# Altium PCB MainPCB.PcbDoc
Units mm, origin at the board's own origin, x right, y up, seen from the top; angles counter-clockwise.
Board outline 98.17 x 99.82 mm, 4 copper layers (Top Layer, PWR, GND, Bottom Layer), stack 1.57 mm thick; 53 components, 48 nets, 225 pads, 28 vias.
Unrouted connection lines stored in the file: 41.
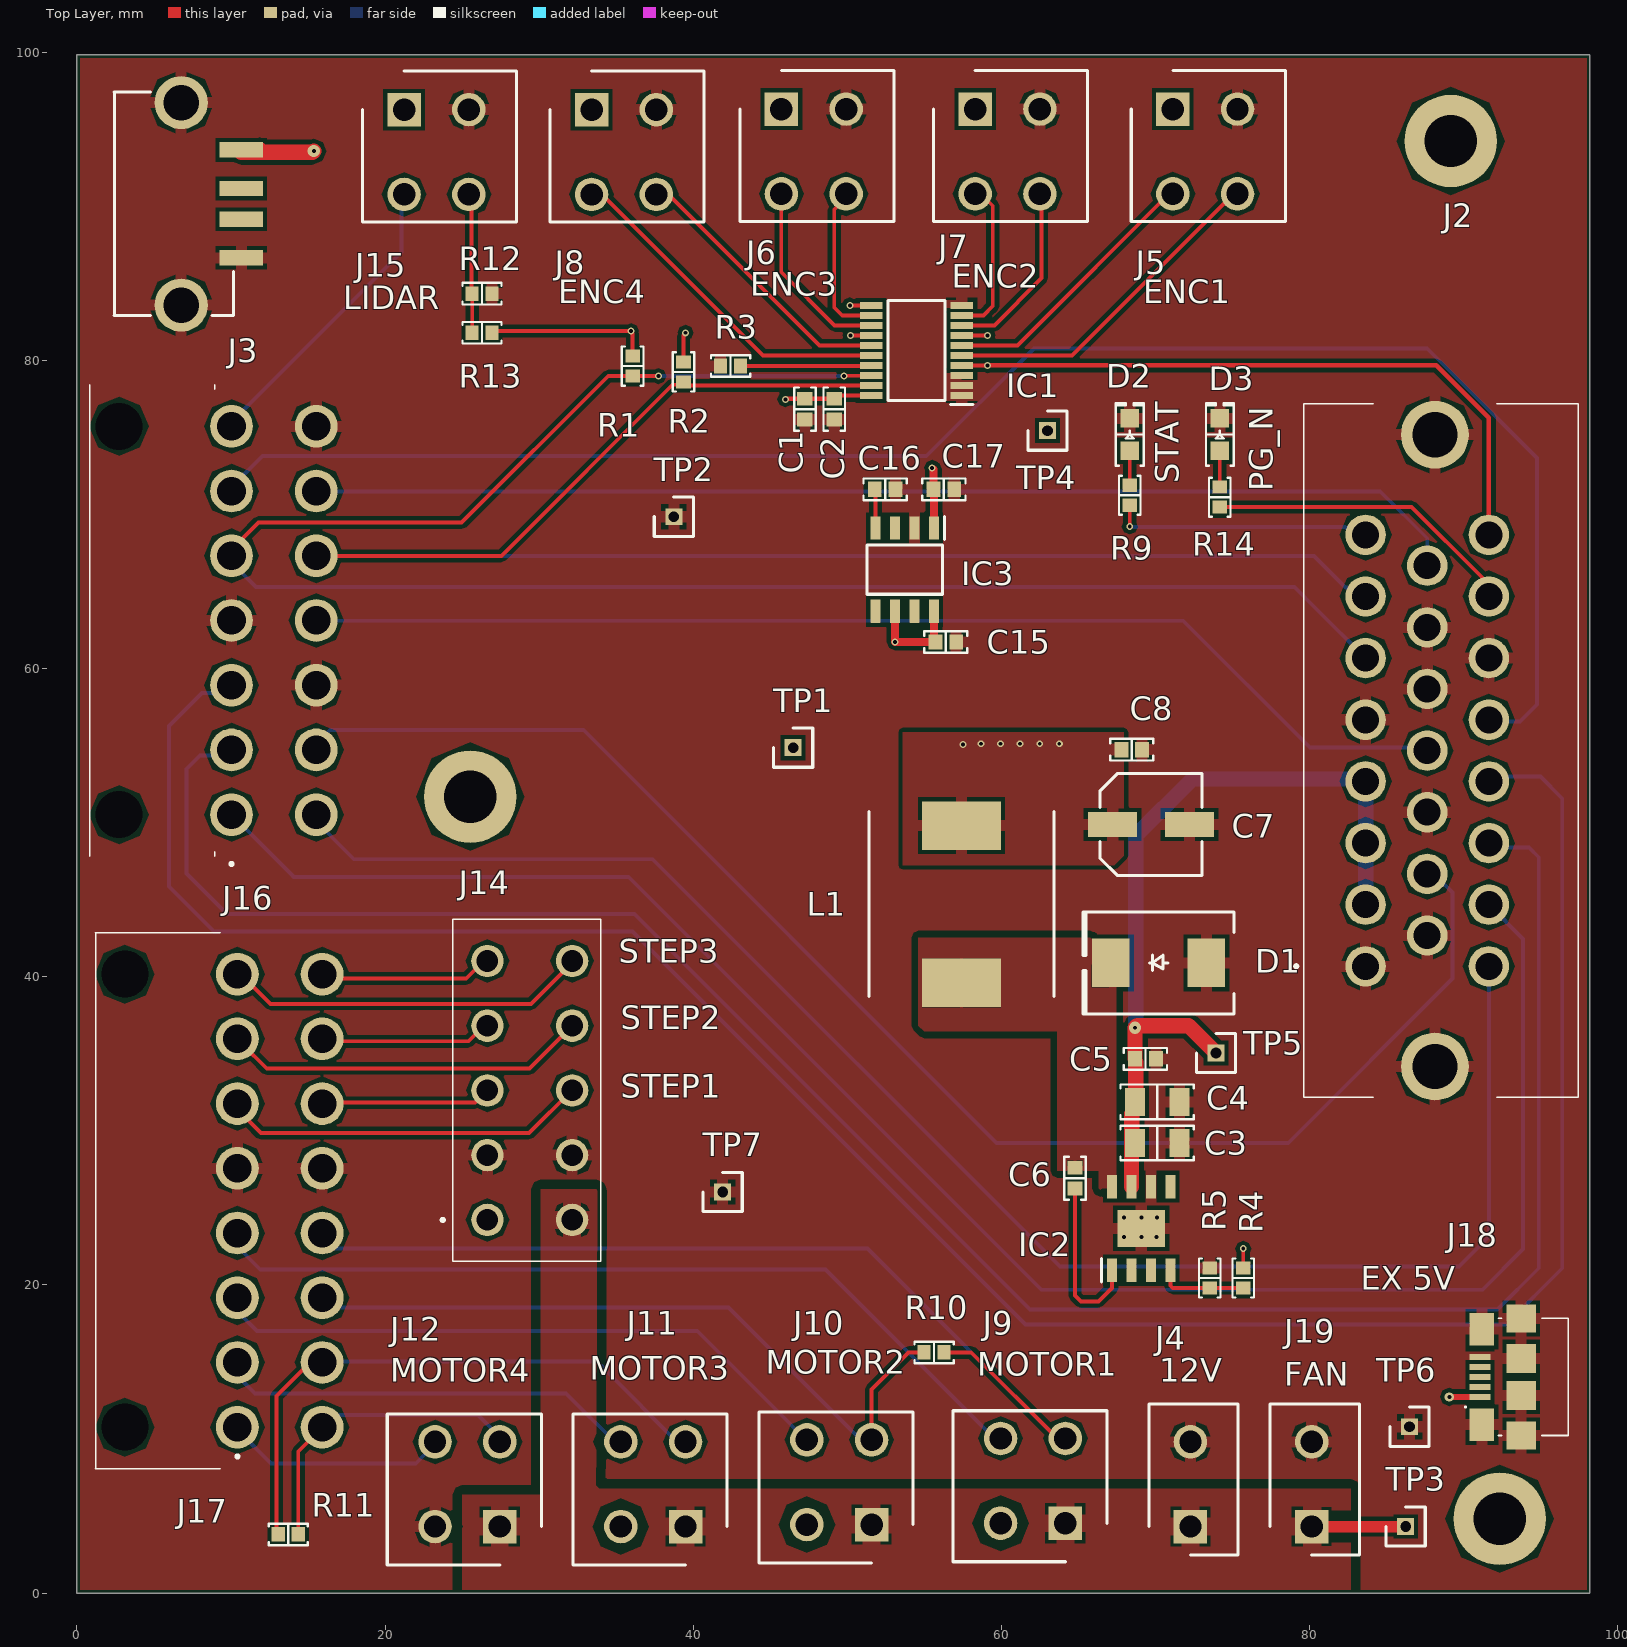
[diagram p0: Top Layer view]
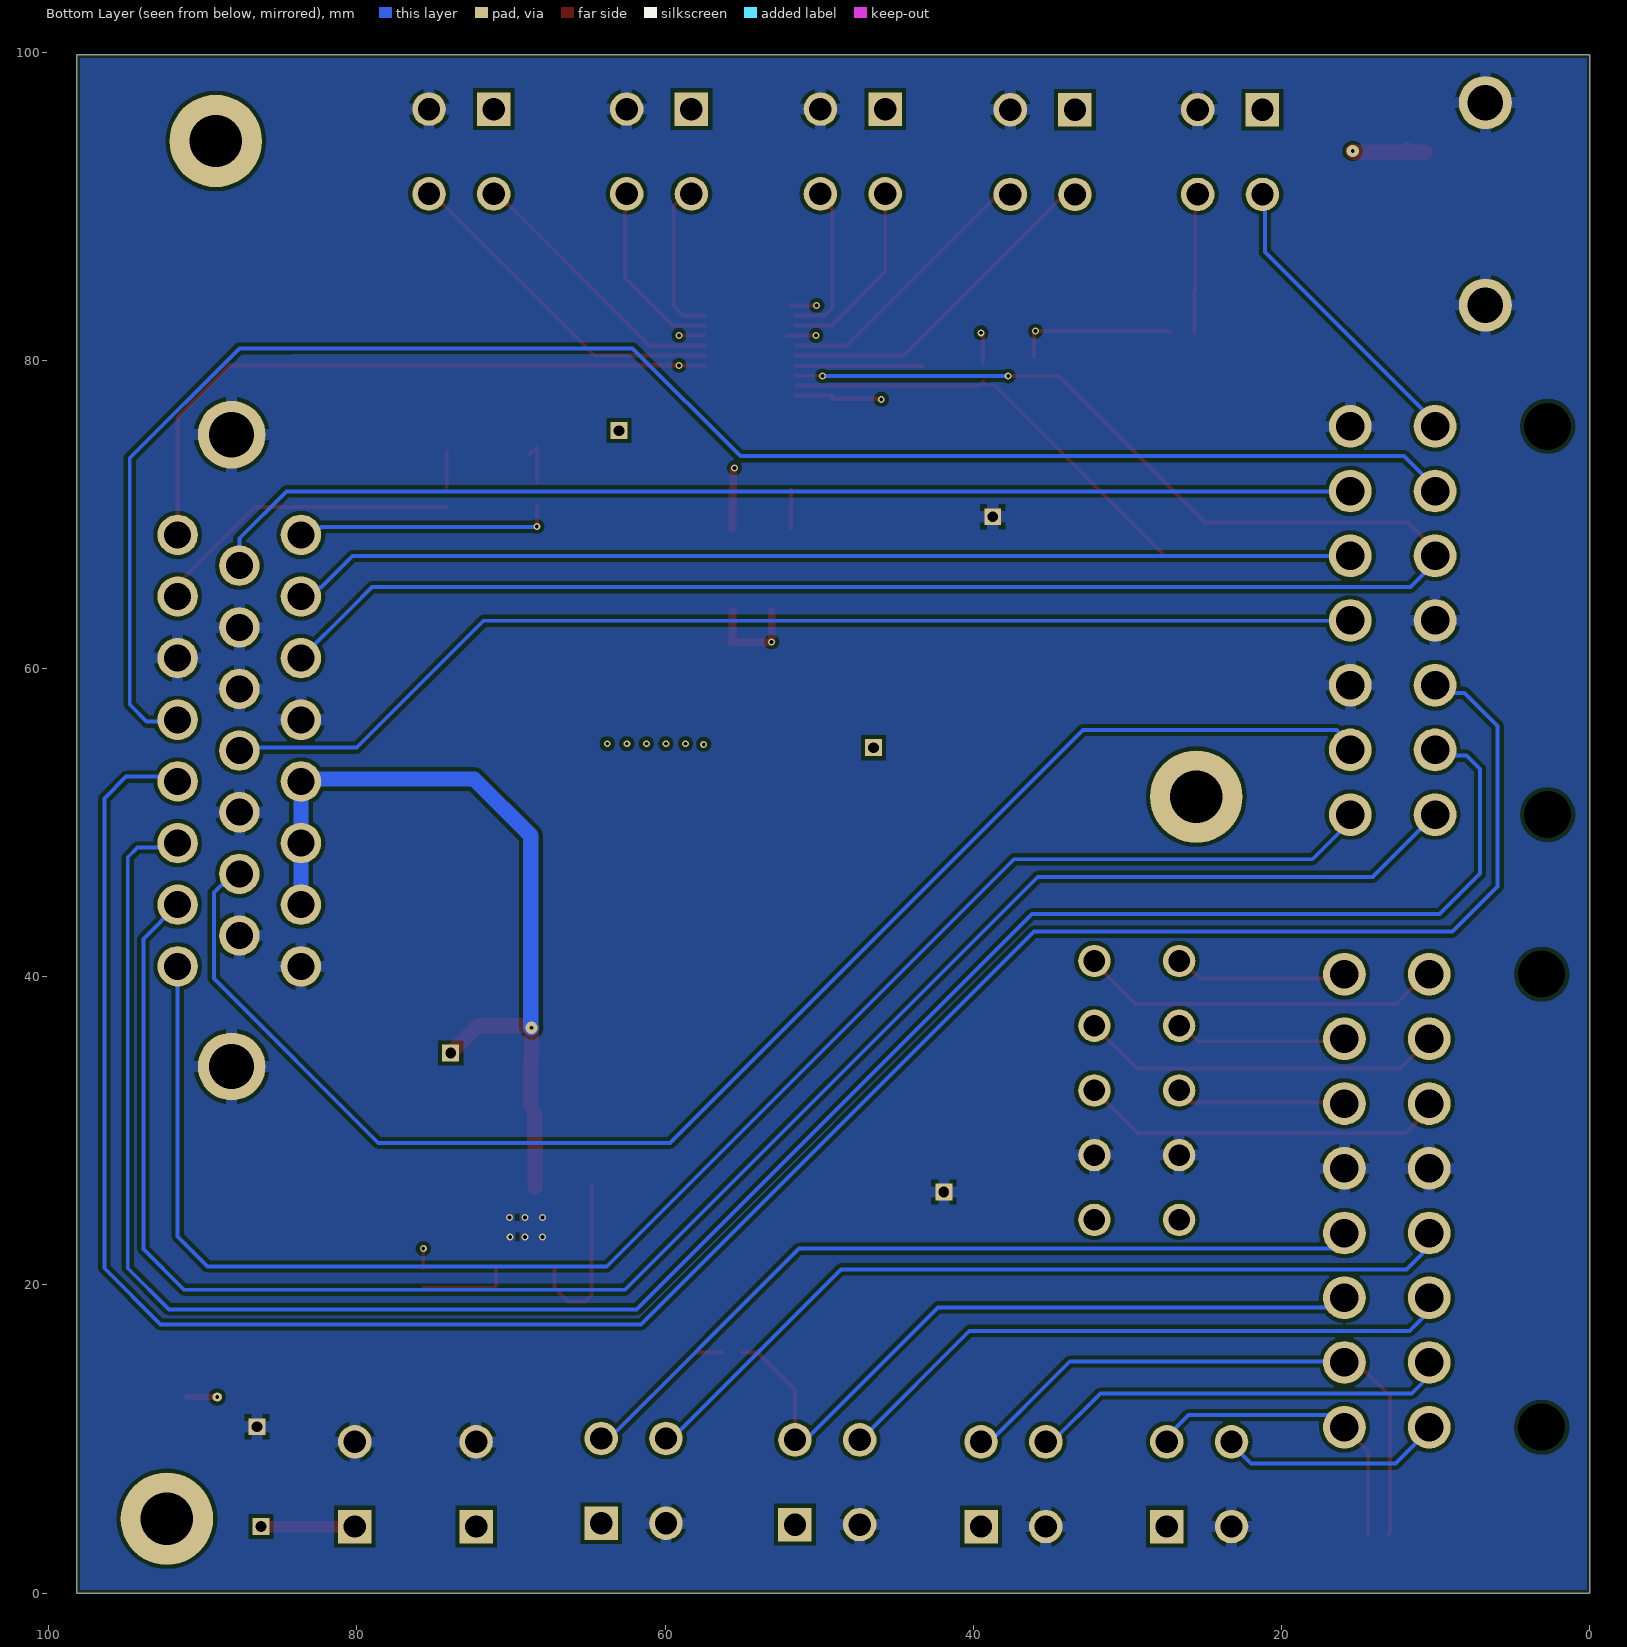
[diagram p1: Bottom Layer view, seen from below]
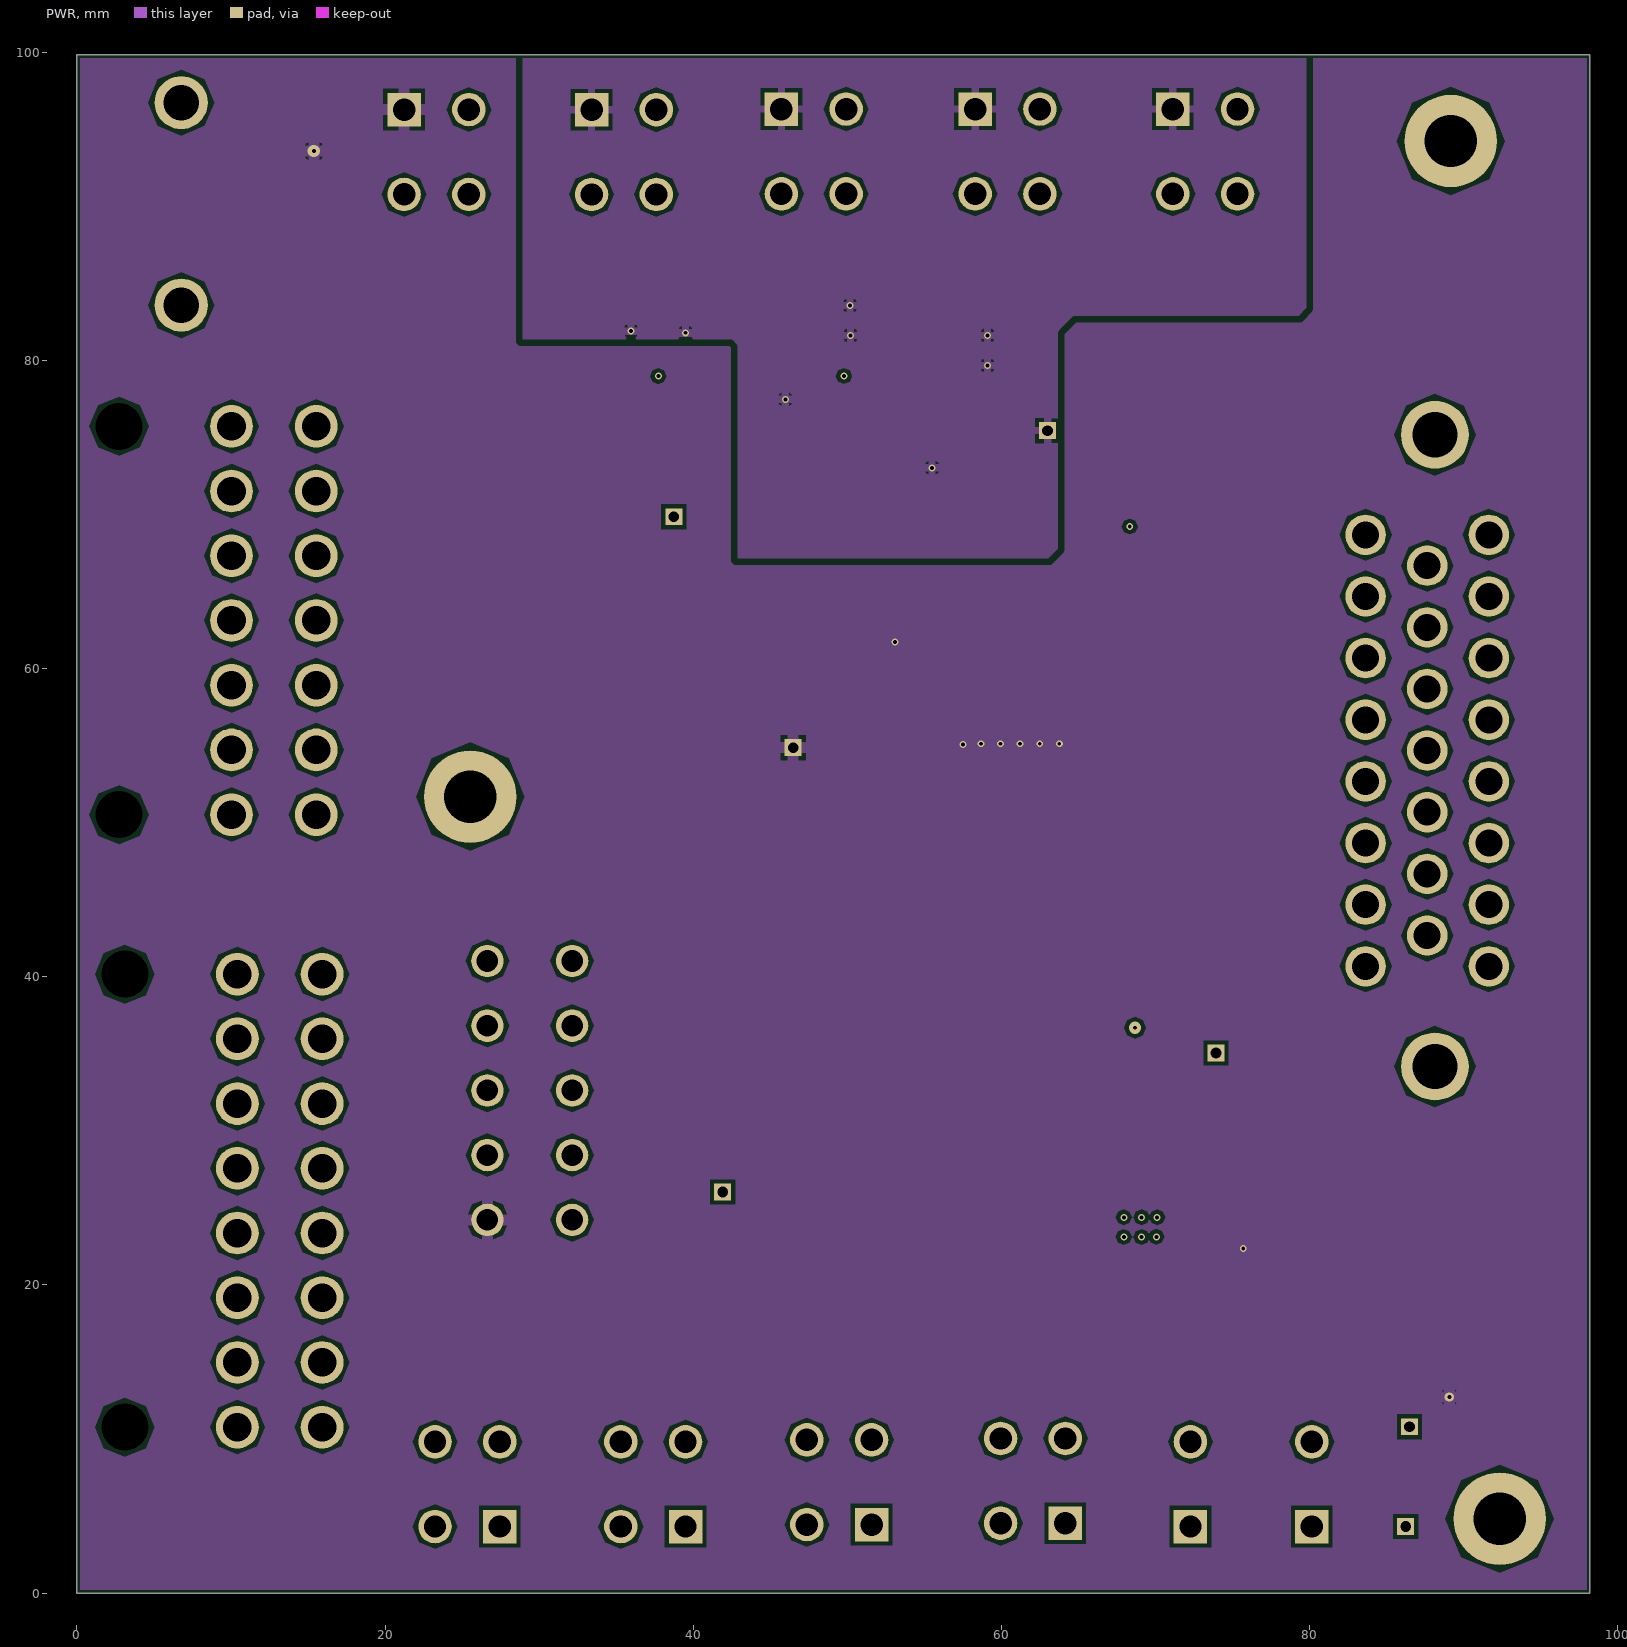
[diagram p2: PWR]
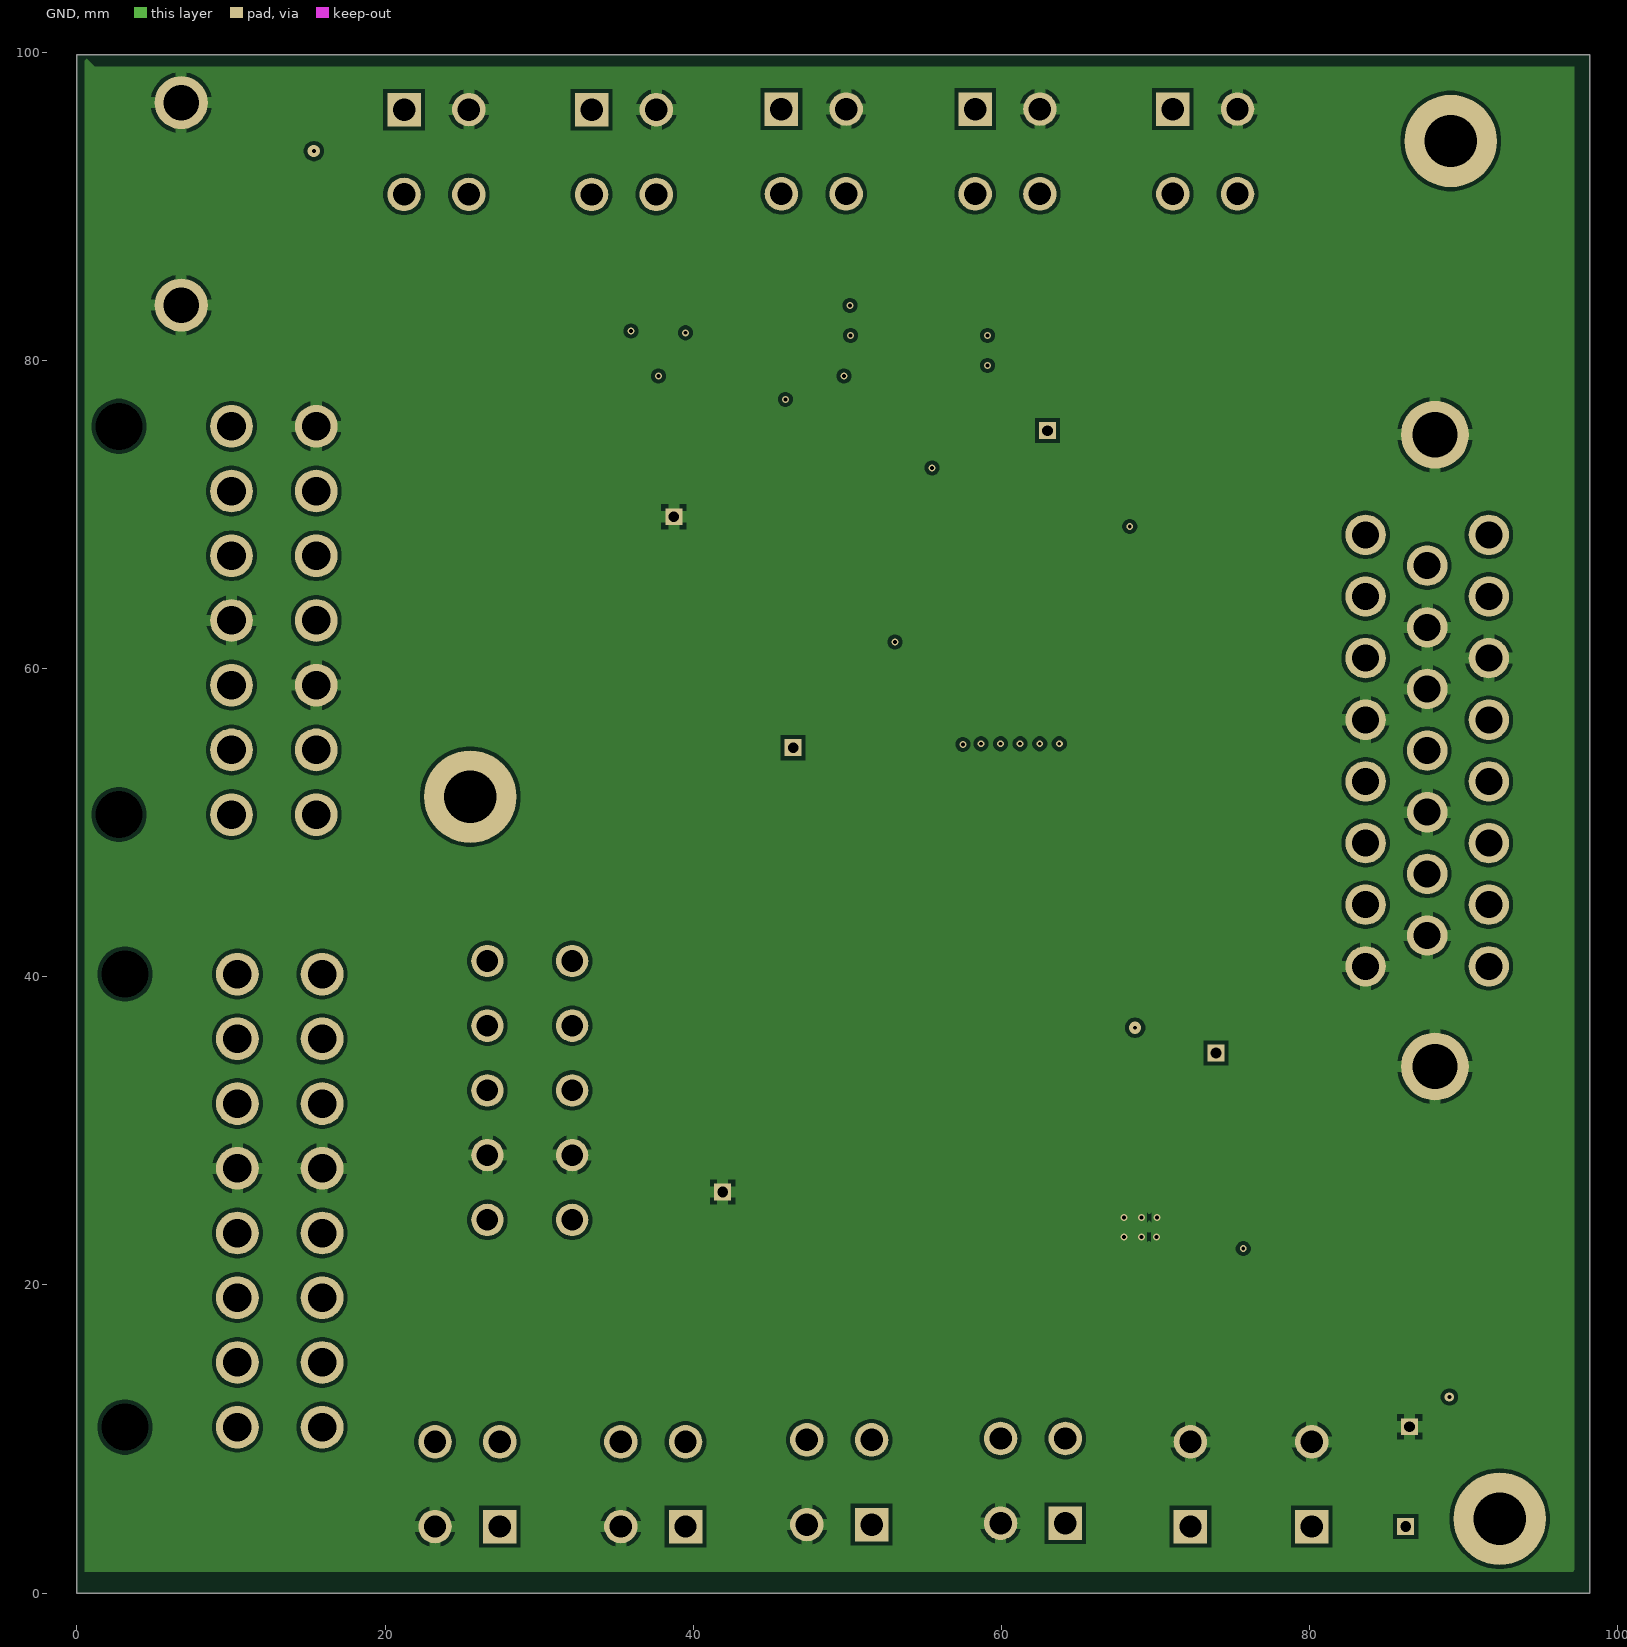
[diagram p3: GND]
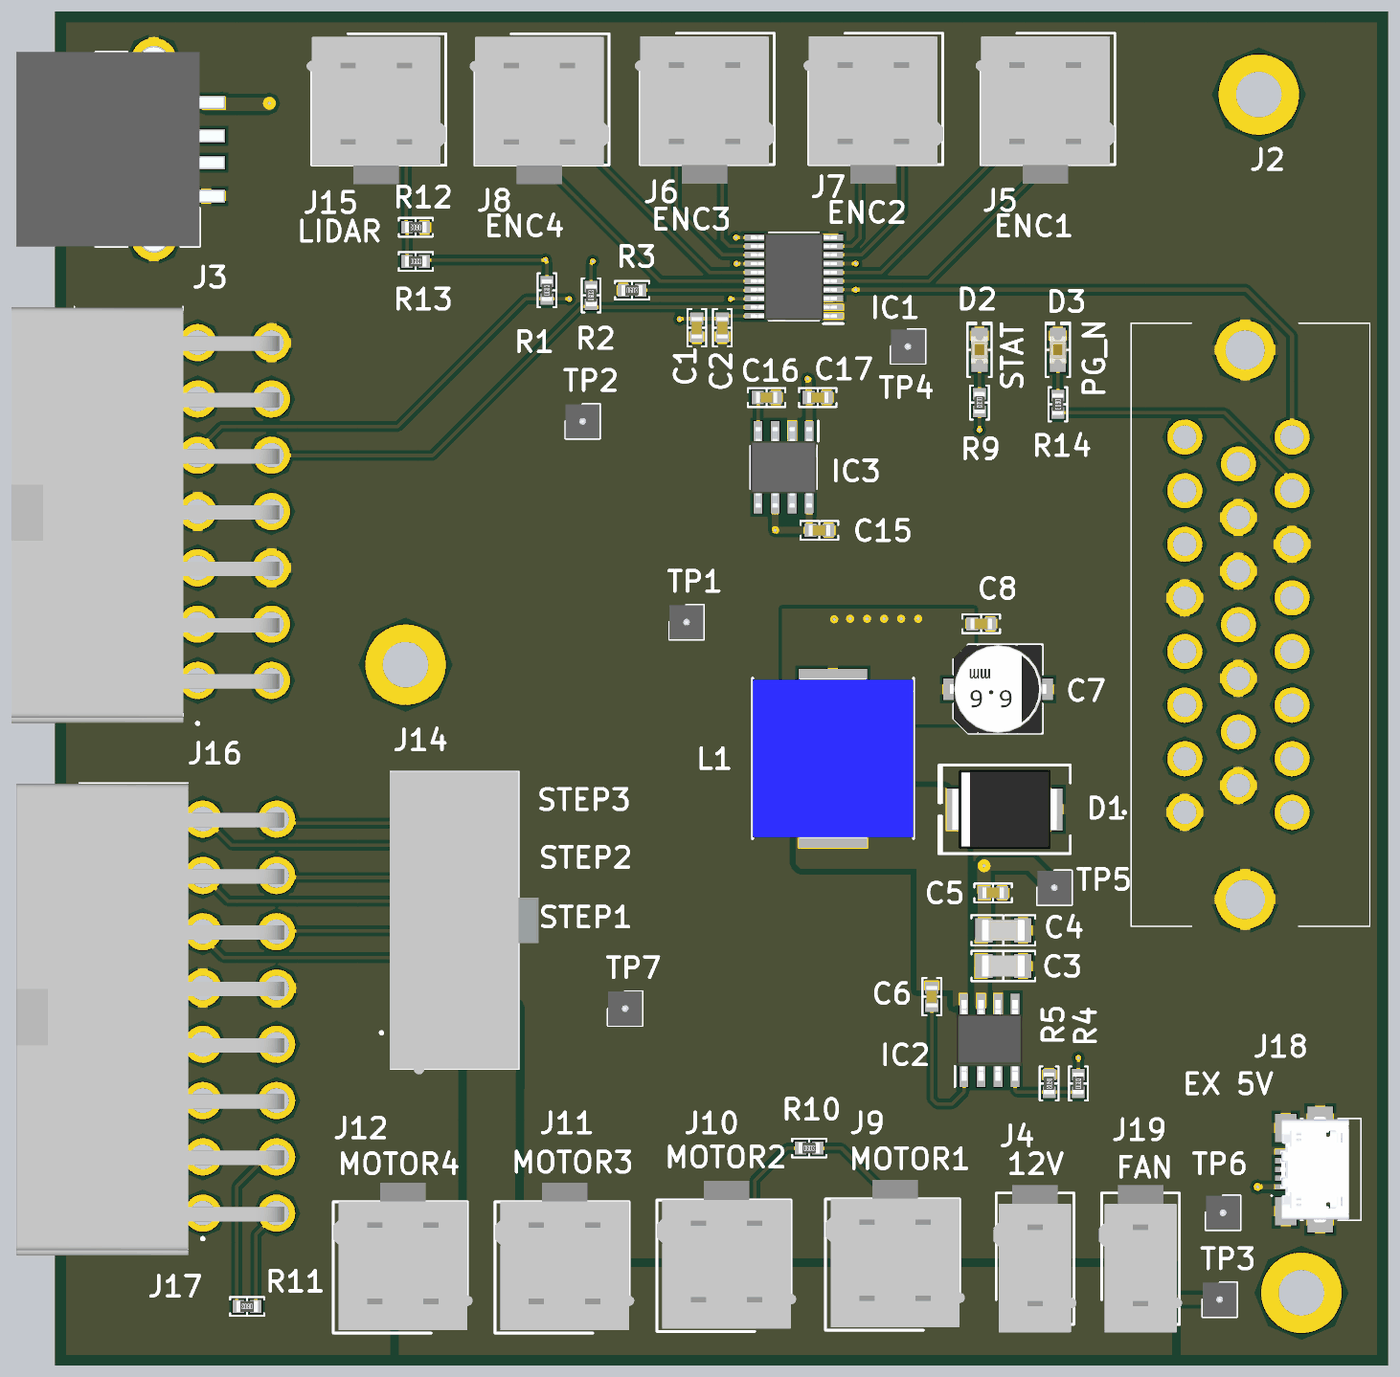
[diagram p4: 3D render of the assembled board from above, using the file's embedded part models]

## Layer stack, top to bottom
Top Solder: solder mask 0.0127, Solder Resist, Dk 3.8
Top Layer: signal copper 0.035
Dielectric 1: prepreg 0.2, 7628, Dk 4.6
PWR: signal copper 0.0175
Core: core 1.065, FR-4, Dk 4.5
GND: signal copper 0.0175
Dielectric 2: prepreg 0.2, 7628, Dk 4.6
Bottom Layer: signal copper 0.035
Bottom Solder: solder mask 0.0127, Solder Resist, Dk 3.8

## Board outline
0,0 98.171,0 98.171,99.822 0,99.822

## Design rules (kind name [scope] priority, off if disabled: settings)
BoardOutlineClearance [All] p1: gap=0.2 ignorepadtopadclearanceinfootprint=FALSE
Clearance Clearance_4 [InNamedPolygon('NETC6_1_L01_P044')] p1: gap=0.4 ignorepadtopadclearanceinfootprint=FALSE except(0: Arc-Hole Track-Hole SMDPad-Hole THPad-Hole Via-Hole Fill-Hole Poly-Hole Region-Hole Text-Hole; 0.254: Arc-Text Track-Text SMDPad-Text THPad-Text Via-Text Fill-Text Poly-Text Region-Text Text-Text)
Clearance Clearance_3 [InNamedPolygon('12V_L01_P041')] p2: gap=0.6 ignorepadtopadclearanceinfootprint=FALSE except(0: Arc-Hole Track-Hole SMDPad-Hole THPad-Hole Via-Hole Fill-Hole Poly-Hole Region-Hole Text-Hole; 0.5: Arc-Text Track-Text SMDPad-Text THPad-Text Via-Text Fill-Text Poly-Text Region-Text Text-Text)
Clearance [All] p3: gap=0.25 ignorepadtopadclearanceinfootprint=FALSE except(0.102: Hole-Hole; 0.12: Arc-Arc Arc-Track Track-Track; 0.15: Arc-SMDPad Arc-THPad Arc-Via Arc-Hole Track-SMDPad Track-THPad Track-Via Track-Hole SMDPad-SMDPad SMDPad-THPad THPad-THPad)
Clearance PolyClearance [InNet('12V')] p4: gap=5 ignorepadtopadclearanceinfootprint=FALSE
ComponentClearance [All] p1: gap=0.102 collisioncheckmode=3 verticalgap=0.102 showdistances=TRUE
DiffPairsRouting [All] p1: maxlimit=0.102 minlimit=0.102 mostfreqgap=0.102 toplayer_minwidth=0.102 toplayer_maxwidth=1816.048 toplayer_prefwidth=0.102 midlayer1_minwidth=0.102 midlayer1_maxwidth=1816.048 midlayer1_prefwidth=0.102 midlayer2_minwidth=0.102 midlayer2_maxwidth=1816.048 midlayer2_prefwidth=0.102 bottomlayer_minwidth=0.102 bottomlayer_maxwidth=1816.048 bottomlayer_prefwidth=0.102 maxuncoupledlength=12.7
Height [All] p1: minheight=0 maxheight=1816.048 prefheight=12.7
HoleSize [All] p1: absolutevalues=TRUE maxlimit=6.3 minlimit=0.2 maxpercent=80.000 minpercent=20.000
HoleToHoleClearance [All] p1: gap=0.25 allowstackedmicrovias=FALSE
MinimumAnnularRing [All] p1: minimumring=0.076
MinimumSolderMaskSliver [All] p1: minsoldermaskwidth=0
PlaneClearance [All] p1: clearance=0.2
PlaneConnect PlaneConnectPowerPads [InPadClass('PowerPads')] p1: planeconnectstyle=Relief reliefexpansion=0.508 reliefentries=4 reliefconductorwidth=1 reliefairgap=0.15
PlaneConnect [All] p2: planeconnectstyle=Relief reliefexpansion=0.3 reliefentries=4 reliefconductorwidth=1 reliefairgap=0.2
PolygonConnect PolygonConnect_2 [InNet('3V3')] p1: connectstyle=Relief reliefconductorwidth=0.5 reliefentries=4 polygonreliefangle="90 Angle" airgapwidth=0.254
PolygonConnect PolygonConnect_3 [InNet('5V')] p2: connectstyle=Relief reliefconductorwidth=0.75 reliefentries=4 polygonreliefangle="90 Angle" airgapwidth=0.254
PolygonConnect PolygonConnect_1 [InNet('GND')] p3: connectstyle=Relief reliefconductorwidth=0.75 reliefentries=4 polygonreliefangle="90 Angle" airgapwidth=0.254
PolygonConnect PolygonConnectPowerPads [All vs (InPadClass('PowerPads'))] p4: connectstyle=Relief reliefconductorwidth=0.5 reliefentries=4 polygonreliefangle="90 Angle" airgapwidth=0.254
PolygonConnect [InNet('12V')] p5: connectstyle=Relief reliefconductorwidth=1.2 reliefentries=4 polygonreliefangle="90 Angle" airgapwidth=0.2
RoutingVias [All] p1: holewidth=0.2 width=0.45 viastyle="Through Hole" minholewidth=0.2 minwidth=0.45 maxholewidth=6.3 maxwidth=6.55
SilkToSilkClearance [All] p1: silktosilkclearance=0
SilkToSolderMaskClearance [IsPad] p1: minsilkscreentomaskgap=0.102 clearancetoexposedcopper=TRUE
SolderMaskExpansion [All] p1: expansion=0.075 istentingtop=FALSE
Width [All] p1: maxlimit=1816.048 minlimit=0.102 preferedwidth=0.102
20 further rules are at their usual default settings.

## Classes and differential pairs
component class Designator: C1 C2 IC1 J5 J6 J7 J8 J9 J10 J11 J12 J14 J15 R1 R2 R3 R12 R13

## Components (designator, comment, footprint, x,y, rotation, side; value= is the part's Value field where it differs from the comment)
C1 "1µF" "CAP 0603_1608" 47.244,76.835 r90 top
C2 "10000pF" "CAP 0603_1608" 49.149,76.835 r90 top
C3 "4.7µF" "CAP 1206_3216 - 1.0MM" 70.104,29.21 r180 top
C4 "4.7µF" "CAP 1206_3216 - 1.0MM" 70.104,31.877 r180 top
C5 "10000pF" "CAP 0603_1608" 69.342,34.671 r180 top
C6 "10000pF" "CAP 0603_1608" 64.77,26.924 r270 top
C7 "330µF" "CAP ALSMD 6.6MM H7.7MM" 69.707,49.876 r0 top
C8 "10000pF" "CAP 0603_1608" 68.453,54.737 r180 top
C15 "1µF" "CAP 0603_1608" 56.388,61.722 r180 top
C16 "470pF" "CAP 0603_1608" 52.451,71.628 r180 top
C17 "1µF" "CAP 0603_1608" 56.261,71.628 r180 top
D1 "S5A-E3/57T" "DO214AB SMC" 70.196,40.894 r180 top
D2 "Red" "LED 0805_2012 RED" 68.326,75.184 r90 top
D3 "Red" "LED 0805_2012 RED" 74.168,75.184 r90 top
IC1 "PCA9544APWR" SOP65P640X120-20N 54.483,80.645 r180 top
IC2 "TPS5450MDDAREP" SOIC127P600X170-9N 69.072,23.67 r90 top
IC3 "TC1263-3.3VOATR" SOIC127P600X175-8N 53.721,66.421 r270 top
J2 "776087-1" 7760871 83.63,40.675 r90 top
J3 "A-USBA_SMT-R" AUSBASMTR 3.568,90.154 r270 top
J4 "39-28-8020" SHDR2W125P550X420_2X1_540X960X1310P 72.263,4.318 r0 top
J5 "39-28-8040" RHDR4W125P550X420_2X2_960X960X1310P 71.12,96.305 r0 top
J6 "39-28-8040" RHDR4W125P550X420_2X2_960X960X1310P 45.72,96.305 r0 top
J7 "39-28-8040" RHDR4W125P550X420_2X2_960X960X1310P 58.293,96.305 r0 top
J8 "39-28-8040" RHDR4W125P550X420_2X2_960X960X1310P 33.401,96.266 r0 top
J9 "39-28-8040" RHDR4W125P550X420_2X2_960X960X1310P 64.144,4.533 r180 top
J10 "39-28-8040" RHDR4W125P550X420_2X2_960X960X1310P 51.571,4.445 r180 top
J11 "39-28-8040" RHDR4W125P550X420_2X2_960X960X1310P 39.497,4.318 r180 top
J12 "39-28-8040" RHDR4W125P550X420_2X2_960X960X1310P 27.441,4.318 r180 top
J14 "46015-1002" 460151002 26.64,24.221 r270 top
J15 "39-28-8040" RHDR4W125P550X420_2X2_960X960X1310P 21.234,96.271 r0 top
J16 "39-30-1140" 39301142 10.033,50.519 r270 top
J17 "39-30-0160" 39301160 6.908,25.468 r270 top
J18 "10118192-0002LF" 101181920002LF 93.914,14.027 r90 top
J19 "39-28-8020" SHDR2W125P550X420_2X1_540X960X1310P 80.137,4.318 r0 top
L1 "CDRH127_LDNP-150MC" INDPM120120X800N 57.404,44.704 r90 top
R1 "10 kOhms" "RES 0603_1608" 36.068,79.629 r90 top
R2 "10 kOhms" "RES 0603_1608" 39.37,79.248 r90 top
R3 "10 kOhms" "RES 0603_1608" 42.418,79.629 r0 top
R4 "10 kOhms" "RES 0603_1608" 75.692,20.447 r90 top
R5 "3.16 kOhms" "RES 0603_1608" 73.517,20.447 r270 top
R9 "470 Ohms" "RES 0603_1608" 68.326,71.247 r270 top
R10 "0" "RES 0603_1608" 55.626,15.621 r0 top
R11 "0" "RES 0603_1608" 13.716,3.81 r180 top
R12 "0" "RES 0603_1608" 26.289,84.328 r180 top
R13 "0" "RES 0603_1608" 26.289,81.788 r0 top
R14 "470 Ohms" "RES 0603_1608" 74.168,71.12 r270 top
TP1 "380-10-101-00-002000" HDRV1W51P0X254_1X1_254X254X470P 46.482,54.864 r0 top
TP2 "380-10-101-00-002000" HDRV1W51P0X254_1X1_254X254X470P 38.735,69.85 r0 top
TP3 "380-10-101-00-002000" HDRV1W51P0X254_1X1_254X254X470P 86.233,4.318 r0 top
TP4 "380-10-101-00-002000" HDRV1W51P0X254_1X1_254X254X470P 62.992,75.438 r0 top
TP5 "380-10-101-00-002000" HDRV1W51P0X254_1X1_254X254X470P 73.914,35.052 r0 top
TP6 "380-10-101-00-002000" HDRV1W51P0X254_1X1_254X254X470P 86.487,10.795 r0 top
TP7 "380-10-101-00-002000" HDRV1W51P0X254_1X1_254X254X470P 41.91,26.035 r0 top

## Footprints (in the part's own frame and the unit in brackets; to place one, negate y for a bottom-side part, rotate by r counter-clockwise, add the part's x,y. Pads: shape width x height; smd on the part's side, far side on the other; paste and mask are expansions set on the pad)
7760871 [mm]
  round 2.625 hole 1.75: 1(0,0) 2(4,0) 3(8,0) 4(12,0) 5(16,0) 6(20,0) 7(24,0) 8(28,0) 9(2,-4) 10(6,-4) 11(10,-4) 12(14,-4) 13(18,-4) 14(22,-4) 15(26,-4) 16(0,-8) 17(4,-8) 18(8,-8) 19(12,-8) 20(16,-8) 21(20,-8) 22(24,-8) 23(28,-8)
  round 4.395 hole 2.93: MH1(-6.5,-4.5) MH2(34.5,-4.5)
  silkscreen extent -8.5,-13.8 36.5,4.6
39301142 [mm]
  round 2.775 hole 1.85: 1(0,0) 2(-4.2,0) 3(-8.4,0) 4(-12.6,0) 5(-16.8,0) 6(-21,0) 7(-25.2,0) 8(0,5.5) 9(-4.2,5.5) 10(-8.4,5.5) 11(-12.6,5.5) 12(-16.8,5.5) 13(-21,5.5) 14(-25.2,5.5)
  round 1.525 hole 3.05 unplated: MH1(0,-7.3) MH2(-25.2,-7.3)
  silkscreen extent -27.9,-9.2 3.3,0.1, body extent -27.82,-13.87 3.18,6.07, height 11.4
39301160 [mm]
  round 2.775 hole 1.85: 1(14.7,3.506) 2(10.5,3.506) 3(6.3,3.506) 4(2.1,3.506) 5(-2.1,3.506) 6(-6.3,3.506) 7(-10.5,3.506) 8(-14.7,3.506) 9(14.7,9.006) 10(10.5,9.006) 11(6.3,9.006) 12(2.1,9.006) 13(-2.1,9.006) 14(-6.3,9.006) 15(-10.5,9.006) 16(-14.7,9.006)
  round 1.525 hole 3.05 unplated: 17(-14.7,-3.794) 18(14.7,-3.794)
  silkscreen extent -17.4,-5.72 17.4,3.61, body extent -17.33,-10.38 17.87,9.56, height 11.4
460151002 [mm]
  round 2.1 hole 1.4: 1(0,0) 2(-4.2,0) 3(-8.4,0) 4(-12.6,0) 5(-16.8,0) 6(0,5.5) 7(-4.2,5.5) 8(-8.4,5.5) 9(-12.6,5.5) 10(-16.8,5.5)
  silkscreen extent -19.5,-3 2.7,7.35, body extent -19.5,-2.3 3.1,8.8, height 12.72
101181920002LF [mm]
  rect 0.4x1.35 smd: 1(-1.3,2.862) 2(-0.65,2.862) 3(0,2.862) 4(0.65,2.862) 5(1.3,2.862)
  rect 2.1x1.6 smd: MP1(-3.1,2.737) MP6(3.1,2.737)
  rect 1.8x1.9 smd: MP2(-3.8,0.188) MP5(3.8,0.188)
  rect 1.9x1.9 smd: MP3(-1.2,0.188) MP4(1.2,0.188)
  silkscreen extent -3.8,-2.86 3.8,3.85, body extent -3.95,-1.95 3.95,3.15, height 2.77
AUSBASMTR [mm]
  rect 1x2.8 smd: 1(-3.5,7.1) 2(-1,7.1) 3(1,7.1) 4(3.5,7.1)
  round 3.45 hole 2.3: MH1(-6.57,3.2) MH2(6.57,3.2)
  silkscreen extent -7.25,-1.14 7.25,6.6, body extent -7.61,-7.1 7.62,8.4, height 7.22
"CAP 0603_1608" [mm] "Chip Capacitor, 2-Leads, Body 1.60x0.80mm, IPC Medium Density"
  rect 0.9x1 smd: 1(-0.675,0) 2(0.675,0)
  silkscreen extent -1.4,-0.7 1.4,0.7, body extent -0.8,-0.41 0.8,0.41, height 0.82
"CAP 1206_3216 - 1.0MM" [mm] "Chip Capacitor, 2-Leads, Body 3.25x1.60mm, IPC Medium Density"
  rect 1.3x1.8 smd: 1(-1.45,0) 2(1.45,0)
  silkscreen extent -2.37,-1.12 2.37,1.12, body extent -1.6,-0.8 1.6,0.8, height 1
"CAP ALSMD 6.6MM H7.7MM" [mm] "Aluminum Electrolytic Capacitor, Body 6.60x6.60x7.70mm, IPC Low Density"
  rect 3.2x1.6 smd: 1(-2.5,0) 2(2.5,0)
  silkscreen extent -3.3,-3.3 3.3,3.3, body extent -3.6,-3.3 3.6,3.3, height 7.7
"DO214AB SMC" [mm] "Molded Diode, 2-Leads, Body 6.85x5.90mm, IPC Medium Density"
  rect 2.45x3.15 smd: 1(-3.1,0) 2(3.1,0)
  silkscreen extent -4.9,-3.3 4.9,3.3, body extent -3.97,-2.95 3.97,2.95, height 2.6
HDRV1W51P0X254_1X1_254X254X470P [mm]
  rect 1.1x1.1 hole 0.7: 1(0,0)
  silkscreen extent -1.27,-1.27 1.27,1.27, body extent -1.27,-1.27 1.27,1.27, height 4.7
INDPM120120X800N [mm]
  rect 3.15x5.1 smd: 1(-5.1,0) 2(5.1,0)
  silkscreen extent -6,-6 6,6, body extent -6,-6 6,6, height 8
"LED 0805_2012 RED" [mm] "Chip Diode, 2-Leads, Body 2.00x1.25mm, IPC Medium Density"
  rect 1.2x1.2 smd: 1(-1.05,0) 2(1.05,0)
  silkscreen extent -2.03,-0.9 2.03,0.9, body extent -1,-0.62 1,0.63, height 0.9
"RES 0603_1608" [mm] "Chip Resistor, 2-Leads, Body 1.60x0.80mm, IPC Medium Density"
  rect 0.85x0.95 smd: 1(-0.65,0) 2(0.65,0)
  silkscreen extent -1.27,-0.7 1.27,0.7, body extent -0.8,-0.4 0.8,0.4, height 0.45
RHDR4W125P550X420_2X2_960X960X1310P [mm]
  rect 2.175x2.175 hole 1.45: 1(0,0)
  round 2.175 hole 1.45: 2(0,-5.5) 3(4.2,0) 4(4.2,-5.5)
  silkscreen extent -2.7,-7.3 7.3,2.5, body extent -3.09,-8.72 7.31,2.28, height 12.73
SHDR2W125P550X420_2X1_540X960X1310P [mm]
  rect 2.175x2.175 hole 1.45: 1(0,0)
  round 2.175 hole 1.45: 2(0,5.5)
  silkscreen extent -2.7,-1.85 3.1,7.95, body extent -2.9,-2.45 3.3,8.55, height 12.8
SOIC127P600X170-9N [mm]
  rect 1.525x0.65 smd: 1(-2.712,1.905) 2(-2.712,0.635) 3(-2.712,-0.635) 4(-2.712,-1.905) 5(2.712,-1.905) 6(2.712,-0.635) 7(2.712,0.635) 8(2.712,1.905)
  rect 2.4x3.1 smd: 9(0,0)
  silkscreen extent -3.47,2.58 -1.95,2.58, body extent -3.01,-2.45 3.01,2.45, height 1.57
SOIC127P600X175-8N [mm]
  rect 1.5x0.65 smd: 1(-2.7,1.905) 2(-2.7,0.635) 3(-2.7,-0.635) 4(-2.7,-1.905) 5(2.7,-1.905) 6(2.7,-0.635) 7(2.7,0.635) 8(2.7,1.905)
  silkscreen extent -3.45,-2.45 1.6,2.58, body extent -3,-2.45 3,2.45, height 1.75
SOP65P640X120-20N [mm]
  rect 1.475x0.45 smd: 1(-2.938,2.925) 2(-2.938,2.275) 3(-2.938,1.625) 4(-2.938,0.975) 5(-2.938,0.325) 6(-2.938,-0.325) 7(-2.938,-0.975) 8(-2.938,-1.625) 9(-2.938,-2.275) 10(-2.938,-2.925) 11(2.938,-2.925) 12(2.938,-2.275) 13(2.938,-1.625) 14(2.938,-0.975) 15(2.938,-0.325) 16(2.938,0.325) 17(2.938,0.975) 18(2.938,1.625) 19(2.938,2.275) 20(2.938,2.925)
  silkscreen extent -3.67,-3.25 1.85,3.5, body extent -3.2,-3.25 3.2,3.25, height 1.13

## Part data
C1 C15 C17: library part C0603C105K4RACAUTO, "CAP CER 0603 1UF 16V X7R 10%", Device Package="0603 (1608 Metric)", Manufacturer=KEMET, Operating Temperature="-55°C ~ 125°C", Ratings=AEC-Q200, Supplier Part Number 1=399-17704-1-ND, Temperature Coefficient=X7R, Tolerance=±10%, Voltage - Rated=16V, Applications="Automotive, Bypass, Decoupling", Capacitance=1µF, ComponentLink1Description=Datasheet, ComponentLink1URL=https://api.kemet.com/component-edge/download/datasheet/C0603C105K4RACAUTO.pdf, ComponentLink2Description="DigiKey Link", ComponentLink2URL=http://digikey.com/product-detail/en/kemet/C0603C105K4RACAUTO/399-17704-1-ND/8635855, LastUpdated="2020-09-02 1:03:36 AM", Lifecycle Status=Active, Minimum Order=1, Mounting Type="Surface Mount, MLCC", Package / Case="0603 (1608 Metric)", Packaging=TapeAndReel, Part Number=C0603C105K4RACAUTO, Part Status=Active, PartId=2179, Price=0.02, Series="SMD Auto X7R", Size / Dimension="0.063\" L x 0.031\" W (1.60mm x 0.80mm)", Supplier 1=DigiKey, Thickness (Max)="0.037\" (0.95mm)"
C2: library part C0603C103M4RACAUTO, "CAP CER 0603 .01UF 16V X7R 20% A", Device Package="0603 (1608 Metric)", Manufacturer=KEMET, Operating Temperature="-55°C ~ 125°C", Ratings=AEC-Q200, Supplier Part Number 1=399-13714-1-ND, Temperature Coefficient=X7R, Tolerance=±20%, Voltage - Rated=16V, Applications="Automotive, Bypass, Decoupling", Capacitance=10000pF, ComponentLink1Description=Datasheet, ComponentLink1URL=https://api.kemet.com/component-edge/download/datasheet/C0603C103M4RACAUTO.pdf, ComponentLink2Description="DigiKey Link", ComponentLink2URL=http://digikey.com/product-detail/en/kemet/C0603C103M4RACAUTO/399-13714-1-ND/6219642, LastUpdated="2020-09-02 1:03:33 AM", Lifecycle Status=Active, Minimum Order=1, Mounting Type="Surface Mount, MLCC", Package / Case="0603 (1608 Metric)", Packaging=TapeAndReel, Part Number=C0603C103M4RACAUTO, Part Status=Active, PartId=3731, Price=0.02, Series="SMD Auto X7R", Size / Dimension="0.063\" L x 0.031\" W (1.60mm x 0.80mm)", Supplier 1=DigiKey, Thickness (Max)="0.034\" (0.87mm)"
C3 C4: library part C3216X7R1E475K085AB, "CAP CER 4.7UF 25V X7R 1206", Device Package="1206 (3216 Metric)", Manufacturer="TDK Corporation", Operating Temperature="-55°C ~ 125°C", Supplier Part Number 1=445-14797-1-ND, Temperature Coefficient=X7R, Tolerance=±10%, Voltage - Rated=25V, Applications="General Purpose", Capacitance=4.7µF, ComponentLink1Description=Datasheet, ComponentLink1URL=https://product.tdk.com/info/en/catalog/datasheets/mlcc_commercial_general_en.pdf?ref_disty=digikey, ComponentLink2Description="DigiKey Link", ComponentLink2URL=http://digikey.com/product-detail/en/tdk-corporation/C3216X7R1E475K085AB/445-14797-1-ND/3956463, Features="Low ESL", LastUpdated="2020-09-02 1:05:06 AM", Lifecycle Status=Active, Minimum Order=1, Mounting Type="Surface Mount, MLCC", Package / Case="1206 (3216 Metric)", Packaging=TapeAndReel, Part Number=C3216X7R1E475K085AB, Part Status=Active, PartId=19105, Price=0.08, Series=C, Size / Dimension="0.126\" L x 0.063\" W (3.20mm x 1.60mm)", Supplier 1=DigiKey, Thickness (Max)="0.039\" (1.00mm)"
C5 C6 C8: library part C0603C103K5RAC7081, "CE SMD 0603 .01UF 10% 50V X7R 2M", Device Package="0603 (1608 Metric)", Manufacturer=KEMET, Operating Temperature="-55°C ~ 125°C", Supplier Part Number 1=399-C0603C103K5RAC7081CT-ND, Temperature Coefficient=X7R, Tolerance=±10%, Voltage - Rated=50V, Applications="Bypass, Decoupling", Capacitance=10000pF, ComponentLink1Description=Datasheet, ComponentLink1URL=https://api.kemet.com/component-edge/download/specsheet/C0603C103K5RAC7081.pdf, ComponentLink2Description="DigiKey Link", ComponentLink2URL=http://digikey.com/product-detail/en/kemet/C0603C103K5RAC7081/399-C0603C103K5RAC7081CT-ND/10483117, LastUpdated="2020-09-02 1:03:31 AM", Lifecycle Status=Active, Minimum Order=1, Mounting Type="Surface Mount, MLCC", Package / Case="0603 (1608 Metric)", Packaging=TapeAndReel, Part Number=C0603C103K5RAC7081, Part Status=Active, PartId=5246, Price=0.01, Series="SMD Comm X7R", Size / Dimension="0.063\" L x 0.031\" W (1.60mm x 0.80mm)", Supplier 1=DigiKey, Thickness (Max)="0.034\" (0.87mm)"
C7: library part 875105245015, "CAP ALUM POLY 330UF 20% 10V SMD", Device Package="Radial, Can - SMD", ESR (Equivalent Series Resistance)=20mOhm, Lifetime @ Temp.="2000 Hrs @ 105°C", Manufacturer="Würth Elektronik", Operating Temperature="-55°C ~ 105°C", Ripple Current @ High Frequency="2.69A @ 100kHz", Ripple Current @ Low Frequency="134.5mA @ 120Hz", Supplier Part Number 1=732-6415-1-ND, Tolerance=±20%, Voltage - Rated=10V, Applications="General Purpose", Capacitance=330µF, ComponentLink1Description=Datasheet, ComponentLink1URL=https://katalog.we-online.de/pbs/datasheet/875105245015.pdf, ComponentLink2Description="DigiKey Link", ComponentLink2URL=http://digikey.com/product-detail/en/w-rth-elektronik/875105245015/732-6415-1-ND/5147966, Height - Seated (Max)="0.303\" (7.70mm)", LastUpdated="2020-09-02 1:25:32 AM", Lifecycle Status=Active, Minimum Order=1, Mounting Type="Surface Mount", Package / Case="Radial, Can - SMD", Packaging=TapeAndReel, Part Number=875105245015, Part Status=Active, PartId=2228, Price=0.40, Series=WCAP-PSLP, Size / Dimension="0.248\" Dia (6.30mm)", Supplier 1=DigiKey, Surface Mount Land Size="0.260\" L x 0.260\" W (6.60mm x 6.60mm)", Type=Polymer
C16: library part C0603C471J3GACAUTO, "CAP CER 470PF 25V C0G/NP0 0603", Device Package="0603 (1608 Metric)", Manufacturer=KEMET, Operating Temperature="-55°C ~ 125°C", Ratings=AEC-Q200, Supplier Part Number 1=399-6891-1-ND, Temperature Coefficient="C0G, NP0", Tolerance=±5%, Voltage - Rated=25V, Applications=Automotive, Capacitance=470pF, ComponentLink1Description=Datasheet, ComponentLink1URL=https://api.kemet.com/component-edge/download/datasheet/C0603C471J3GACAUTO.pdf, ComponentLink2Description="DigiKey Link", ComponentLink2URL=http://digikey.com/product-detail/en/kemet/C0603C471J3GACAUTO/399-6891-1-ND/3314402, Features="Low ESL", LastUpdated="2020-09-02 1:03:35 AM", Lifecycle Status=Active, Minimum Order=1, Mounting Type="Surface Mount, MLCC", Package / Case="0603 (1608 Metric)", Packaging=TapeAndReel, Part Number=C0603C471J3GACAUTO, Part Status=Active, PartId=2407, Price=0.08, Series="SMD Auto C0G", Size / Dimension="0.063\" L x 0.031\" W (1.60mm x 0.80mm)", Supplier 1=DigiKey, Thickness (Max)="0.034\" (0.87mm)"
D1: "DIODE GEN PURP 50V 5A DO214AB", Capacitance @ Vr, F="40pF @ 4V, 1MHz", Current - Average Rectified (Io)=5A, Current - Reverse Leakage @ Vr="10µA @ 50V", Manufacturer="Vishay Semiconductor Diodes Division", Operating Temperature - Junction="-55°C ~ 150°C", Package / Case="DO-214AB, SMC", Supplier Device Package="DO-214AB (SMC)", Supplier Part Number 1=S5A-E3/57TGICT-ND, Voltage - DC Reverse (Vr) (Max)=50V, Voltage - Forward (Vf) (Max) @ If="1.15V @ 5A", ComponentLink1Description=Datasheet, ComponentLink1URL=http://www.vishay.com/docs/88931/s5a.pdf, ComponentLink2Description="DigiKey Link", ComponentLink2URL=http://digikey.com/product-detail/en/vishay-semiconductor-diodes-division/S5A-E3-57T/S5A-E3-57TGICT-ND/3646220, Diode Type=Standard, LastUpdated="2020-09-02 1:18:57 AM", Lifecycle Status=Active, Minimum Order=1, Mounting Type="Surface Mount", Packaging=TapeAndReel, Part Number=S5A-E3/57T, Part Status=Active, PartId=381, Price=0.20, Reverse Recovery Time (trr)=2.5µs, Series=-, Speed="Standard Recovery >500ns, > 200mA (Io)", Supplier 1=DigiKey
D2 D3: library part CMD17-21VRD/TR8, "LED RED DIFFUSED 0805 SMD", Current - Test=20mA, Device Package="0805 (2012 Metric)", Manufacturer="Visual Communications Company - VCC", Millicandela Rating=6mcd, Supplier Device Package=0805, Supplier Part Number 1=L62501CT-ND, Voltage - Forward (Vf) (Typ)=2V, Color=Red, ComponentLink1Description=Datasheet, ComponentLink1URL=https://vcclite.com/wp-content/uploads/wpallimport/files/files/CMD1721Seriesver3.pdf, ComponentLink2Description="DigiKey Link", ComponentLink2URL=http://digikey.com/product-detail/en/visual-communications-company-vcc/CMD17-21VRD-TR8/L62501CT-ND/254934, Configuration=Standard, Height (Max)=1.20mm, LastUpdated="2020-09-02 1:21:00 AM", Lens Color=Red, Lens Size="1.40mm x 1.25mm", Lens Style="Rectangle with Flat Top", Lens Transparency=Diffused, Lifecycle Status=Active, Minimum Order=1, Mounting Type="Surface Mount", Package / Case="0805 (2012 Metric)", Packaging=TapeAndReel, Part Number=CMD17-21VRD/TR8, Part Status=Active, PartId=366, Price=0.12, Series=CMD17-21, Size / Dimension="2.00mm L x 1.25mm W", Supplier 1=DigiKey, Viewing Angle=140°, Wavelength - Peak=640nm
IC1: "Integrated Circuit", Manufacturer_Name="Texas Instruments", Mouser Part Number=595-PCA9544APWR, Arrow Part Number=PCA9544APWR, Arrow Price/Stock=https://www.arrow.com/en/products/pca9544apwr/texas-instruments, Datasheet Link=http://www.ti.com/lit/gpn/pca9544a, Height=1.2mm, Manufacturer_Part_Number=PCA9544APWR, Mouser Price/Stock=https://www.mouser.co.uk/ProductDetail/Texas-Instruments/PCA9544APWR?qs=wgAEGBTxy7mScfqW4P%2FhLg%3D%3D
IC2: "Integrated Circuit", Manufacturer_Name="Texas Instruments", Datasheet Link=http://www.ti.com/lit/gpn/tps5450-ep, Height=1.7mm, Manufacturer_Part_Number=TPS5450MDDAREP
IC3: "Integrated Circuit", Manufacturer_Name=Microchip, Mouser Part Number=579-TC1263-3.3VOATR, Arrow Part Number=TC1263-3.3VOATR, Arrow Price/Stock=https://www.arrow.com/en/products/tc1263-3.3voatr/microchip-technology, Datasheet Link=http://ww1.microchip.com/downloads/en/DeviceDoc/21374D.pdf, Height=1.75mm, Manufacturer_Part_Number=TC1263-3.3VOATR, Mouser Price/Stock=https://www.mouser.co.uk/ProductDetail/Microchip-Technology/TC1263-33VOATR?qs=JKWmWPM4binFIJC0VNJYCQ%3D%3D
J2: "Connector", Manufacturer_Name="TE Connectivity", Mouser Part Number=571-776087-1, Arrow Part Number=776087-1, Arrow Price/Stock=https://www.arrow.com/en/products/776087-1/te-connectivity?region=europe, Datasheet Link=https://componentsearchengine.com/Datasheets/1/776087-1.pdf, Height=32.1mm, Manufacturer_Part_Number=776087-1, Mouser Price/Stock=https://www.mouser.co.uk/ProductDetail/TE-Connectivity/776087-1?qs=qXO2HHLAcoIjggUTPuCD9w%3D%3D
J3: "Connector", Manufacturer_Name="ASSMANN WSW components GmbH", Manufacturer_Part_Number=A-USBA/SMT-R, Height=7.12mm
J4 J19: "Connector", Manufacturer_Name=Molex, Mouser Part Number=538-39-28-8020, Datasheet Link=http://www.molex.com/molex/products/datasheet.jsp?part=active/0039288020_PCB_HEADERS.xml, Height=13.1mm, Manufacturer_Part_Number=39-28-8020, Mouser Price/Stock=https://www.mouser.co.uk/ProductDetail/Molex/39-28-8020?qs=ZZBj1wiNDbnzWLcHr%2Fqwqw%3D%3D
J5 J6 J7 J8 J9 J10 J11 J12 J15: "Connector", Manufacturer_Name=Molex, Mouser Part Number=538-39-28-8040, Arrow Part Number=39-28-8040, Arrow Price/Stock=https://www.arrow.com/en/products/39-28-8040/molex, Datasheet Link=https://www.molex.com/webdocs/datasheets/pdf/en-us/0039288040_PCB_HEADERS.pdf, Height=13.1mm, Manufacturer_Part_Number=39-28-8040, Mouser Price/Stock=https://www.mouser.co.uk/ProductDetail/Molex/39-28-8040?qs=SeTnVz%252B%252BFGDDzw7HSzN2Lw%3D%3D
J14: "Connector", Manufacturer_Name=Molex, Mouser Part Number=538-46015-1002, Datasheet Link=https://www.molex.com/pdm_docs/sd/460151002_sd.pdf, Height=13.3mm, Manufacturer_Part_Number=46015-1002, Mouser Price/Stock=https://www.mouser.co.uk/ProductDetail/Molex/46015-1002?qs=vuaaJtqKbMZiZUhECIrnag%3D%3D
J16: "Connector", Manufacturer_Name=Molex, Mouser Part Number=538-39-30-1140, Datasheet Link=https://www.molex.com/pdm_docs/sd/039301140_sd.pdf, Height=11.25mm, Manufacturer_Part_Number=39-30-1140, Mouser Price/Stock=https://www.mouser.co.uk/ProductDetail/Molex/39-30-1140?qs=ZZBj1wiNDbmCkxw7hxL8nQ%3D%3D
J17: "Connector", Manufacturer_Name=Molex, Mouser Part Number=538-39-30-0160, Datasheet Link=https://www.molex.com/pdm_docs/sd/039300160_sd.pdf, Height=9mm, Manufacturer_Part_Number=39-30-0160, Mouser Price/Stock=https://www.mouser.co.uk/ProductDetail/Molex/39-30-0160?qs=KHty%2FoMxDPnJHzmu54XA5A%3D%3D
J18: "Connector", Manufacturer_Name=Amphenol, Mouser Part Number=649-10118192-0002LF, Arrow Part Number=10118192-0002LF, Arrow Price/Stock=https://www.arrow.com/en/products/10118192-0002lf/amphenol-fci?region=nac, Datasheet Link=https://componentsearchengine.com/Datasheets/1/10118192-0002LF.pdf, Height=3.05mm, Manufacturer_Part_Number=10118192-0002LF, Mouser Price/Stock=https://www.mouser.co.uk/ProductDetail/Amphenol-FCI/10118192-0002LF?qs=KVgMXE4aH4nIkuWlMxQzog%3D%3D
L1: "Inductor", Arrow Part Number=CDRH127/LDNP-150MC, Manufacturer_Name=Sumida, Mouser Part Number=851-CDRH127LDNP150MC, Arrow Price/Stock=https://www.arrow.com/en/products/cdrh127ldnp-150mc/sumida?region=nac, Datasheet Link=https://componentsearchengine.com/Datasheets/1/CDRH127_LDNP-150MC.pdf, Height=8mm, Manufacturer_Part_Number=CDRH127/LDNP-150MC, Mouser Price/Stock=https://www.mouser.co.uk/ProductDetail/Sumida/CDRH127-LDNP-150MC?qs=UC6tolJH7OiTViEpne7nQQ%3D%3D
R1 R2 R3 R4: library part AF0603FR-0710KL, "RES SMD 10K OHM 1% 1/10W 0603", Device Package="0603 (1608 Metric)", Manufacturer=Yageo, Operating Temperature="-55°C ~ 155°C", Power (Watts)="0.1W, 1/10W", Supplier Device Package=0603, Supplier Part Number 1=311-10KLMCT-ND, Temperature Coefficient=±100ppm/°C, Tolerance=±1%, ComponentLink1Description=Datasheet, ComponentLink1URL=http://www.yageo.com/documents/recent/PYu-AF_51_RoHS_L_6.pdf, ComponentLink2Description="DigiKey Link", ComponentLink2URL=http://digikey.com/product-detail/en/yageo/AF0603FR-0710KL/311-10KLMCT-ND/2828170, Composition="Thick Film", Features="Anti-Sulfur, Moisture Resistant", Height - Seated (Max)="0.022\" (0.55mm)", LastUpdated="2020-09-02 1:10:01 AM", Lifecycle Status=Active, Minimum Order=1, Number of Terminations=2, Package / Case="0603 (1608 Metric)", Packaging=TapeAndReel, Part Number=AF0603FR-0710KL, Part Status=Active, PartId=16021, Price=0.01, Resistance="10 kOhms", Series=AF, Size / Dimension="0.063\" L x 0.031\" W (1.60mm x 0.80mm)", Supplier 1=DigiKey
R5: library part CR0603-FX-3161ELF, "RES SMD 3.16K OHM 1% 1/10W 0603", Device Package="0603 (1608 Metric)", Manufacturer="Bourns Inc.", Operating Temperature="-55°C ~ 155°C", Power (Watts)="0.1W, 1/10W", Supplier Device Package=0603, Supplier Part Number 1=CR0603-FX-3161ELFCT-ND, Temperature Coefficient=±100ppm/°C, Tolerance=±1%, ComponentLink1Description=Datasheet, ComponentLink1URL=https://www.bourns.com/docs/Product-Datasheets/CHPREZTR.pdf, ComponentLink2Description="DigiKey Link", ComponentLink2URL=http://digikey.com/product-detail/en/bourns-inc/CR0603-FX-3161ELF/CR0603-FX-3161ELFCT-ND/4247773, Composition="Thick Film", Features="Moisture Resistant", Height - Seated (Max)="0.022\" (0.55mm)", LastUpdated="2020-09-02 1:10:18 AM", Lifecycle Status=Active, Minimum Order=1, Number of Terminations=2, Package / Case="0603 (1608 Metric)", Packaging=CutTape, Part Number=CR0603-FX-3161ELF, Part Status=Active, PartId=8282, Price=0.10, Resistance="3.16 kOhms", Series=CR0603, Size / Dimension="0.063\" L x 0.031\" W (1.60mm x 0.80mm)", Supplier 1=DigiKey
R9 R14: library part ERJ-3EKF4700V, "RES SMD 470 OHM 1% 1/10W 0603", Device Package="0603 (1608 Metric)", Manufacturer="Panasonic Electronic Components", Operating Temperature="-55°C ~ 155°C", Power (Watts)="0.1W, 1/10W", Ratings=AEC-Q200, Supplier Device Package=0603, Supplier Part Number 1=P470HCT-ND, Temperature Coefficient=±100ppm/°C, Tolerance=±1%, ComponentLink1Description=Datasheet, ComponentLink1URL=https://industrial.panasonic.com/cdbs/www-data/pdf/RDA0000/AOA0000C304.pdf, ComponentLink2Description="DigiKey Link", ComponentLink2URL=http://digikey.com/product-detail/en/panasonic-electronic-components/ERJ-3EKF4700V/P470HCT-ND/1746781, Composition="Thick Film", Features="Automotive AEC-Q200", Height - Seated (Max)="0.022\" (0.55mm)", LastUpdated="2020-09-02 1:10:23 AM", Lifecycle Status=Active, Minimum Order=1, Number of Terminations=2, Package / Case="0603 (1608 Metric)", Packaging=TapeAndReel, Part Number=ERJ-3EKF4700V, Part Status=Active, PartId=5664, Price=0.01, Resistance="470 Ohms", Series=ERJ, Size / Dimension="0.063\" L x 0.031\" W (1.60mm x 0.80mm)", Supplier 1=DigiKey
R10 R11 R12 R13: library part TLRZ1JTTD, "RES 0 OHM JUMPER 0603", Device Package="0603 (1608 Metric)", Manufacturer="KOA Speer Electronics, Inc.", Operating Temperature="-55°C ~ 170°C", Ratings=AEC-Q200, Supplier Device Package=0603, Supplier Part Number 1=2019-TLRZ1JTTDCT-ND, Tolerance=Jumper, ComponentLink1Description=Datasheet, ComponentLink1URL=http://www.koaspeer.com/catimages/Products/TLRZ/TLRZ.pdf, ComponentLink2Description="DigiKey Link", ComponentLink2URL=http://digikey.com/product-detail/en/koa-speer-electronics-inc/TLRZ1JTTD/2019-TLRZ1JTTDCT-ND/9847537, Composition="Metal Element", Features="Automotive AEC-Q200, Current Sense", Height - Seated (Max)="0.022\" (0.55mm)", LastUpdated="2020-09-02 1:10:25 AM", Lifecycle Status=Active, Minimum Order=1, Number of Terminations=2, Package / Case="0603 (1608 Metric)", Packaging=TapeAndReel, Part Number=TLRZ1JTTD, Part Status=Active, PartId=4851, Price=0.08, Series=TLRZ, Size / Dimension="0.063\" L x 0.031\" W (1.60mm x 0.80mm)", Supplier 1=DigiKey
TP1 TP2 TP3 TP4 TP5 TP6 TP7: "Connector", Manufacturer_Name=Mill-Max, Mouser Part Number=575-3801010100002000, Arrow Part Number=380-10-101-00-002000, Arrow Price/Stock=https://www.arrow.com/en/products/380-10-101-00-002000/mill-max, Datasheet Link=https://datasheet.datasheetarchive.com/originals/distributors/DKDS-31/604668.pdf, Height=4.7mm, Manufacturer_Part_Number=380-10-101-00-002000, Mouser Price/Stock=https://www.mouser.com/Search/Refine.aspx?Keyword=575-3801010100002000

## Free pads (board coordinates)
  round 6 hole 3.4 unplated: 2(89.154,94.234) 3(92.329,4.826) 4(25.527,51.689)

## Via types
v1: diameter 0.45, hole 0.25, Top Layer to Bottom Layer, 25 vias
v2: diameter 0.8, hole 0.25, Top Layer to Bottom Layer, 2 vias
v3: diameter 0.6, hole 0.25, Top Layer to Bottom Layer, 1 vias

## Nets (pads, with @x,y where several pads share a name; then routed paths per layer and width w, separated by ;. In a path a pad name is that pad's centre, name@x,y a point inside that pad or via, vN(x,y) a via of type N, cw(c..) or ccw(c..) an arc to the next point about the centre after c; other vN are vias at no path point)
3V3: C1.2 C2.2 C17.2 IC1.4 IC1.7 IC1.11 IC1.14 IC1.20 IC3.1 J2.23 J5.1 J6.1 J7.1 J8.1 R1.2 R2.2 R13.2 TP4.1 | length 70.4
  Top Layer w0.254: R13.2@27.193,81.788 27.301,81.896 v1(35.96,81.896) 35.96,81.843 36.068,81.735 R1.2 ; R2.2 39.37,81.608 39.497,81.735 v1(39.497,81.788) ; v1(45.974,77.47) v1@46.014,77.51 ; C2.2@49.149,77.72 IC1.20 ; v1(50.165,83.566) 50.167,83.568 51.82,83.568 IC1.11@51.822,83.566 ; v1(50.206,81.62) IC1.14@52.097,81.62 ; v1(55.499,73.025) v1@55.586,72.938 ; C17.2 C17.2@55.626,71.588 ; IC1.4 v1(59.096,79.67) ; IC1.7@57.463,81.62 v1(59.096,81.62)
  Top Layer w0.3: v1@46.014,77.51 C1.2 C2.2 ; v1(59.096,79.67) 88.224,79.67 91.63,76.264 J2.23
  Top Layer w0.5: C17.2 v1@55.586,72.938 ; IC3.1 C17.2@55.626,71.588
5V: C7.1 C8.2 C15.2 IC3.6 IC3.8 J3.1 J14.1 J15.1 J18.1 L1.2 R4.2 TP1.1 | length 14.6
  Top Layer w0.254: R4.2 v1(75.692,22.352)
  Top Layer w0.4: v3(89.064,12.727) J18.1@91.014,12.727
  Top Layer w0.5: IC3.6 v1(53.086,61.722) C15.2 ; C15.2@55.626,61.809 IC3.8
  Top Layer w1: J3.1@10.668,93.491 15.287,93.491 v2(15.379,93.583) ; J3.1@11.861,93.654 J3.1@11.932,93.583
  other v1: 57.494,55.081 58.674,55.118 59.944,55.118 61.214,55.118 62.484,55.118 63.754,55.118
12V: J4.1 J9.1 J10.1 J11.1 J12.1 J14.6 J19.1 TP3.1 | length 6.1
  Top Layer w0.75: J19.1 TP3.1
ARM_DIR_1: J14.3 J17.14 | length 12
  Top Layer w0.254: J17.14@14.975,31.827 25.846,31.827 J14.3
ARM_DIR_2: J14.4 J17.15 | length 11.2
  Top Layer w0.254: J17.15@15.669,35.814 25.405,35.814 J14.4@26.412,36.821
ARM_DIR_3: J14.5 J17.16 | length 11.1
  Top Layer w0.254: J17.16@15.805,39.878 25.269,39.878 J14.5@26.412,41.021
ARM_STEP_1: J14.8 J17.6 | length 23.8
  Top Layer w0.254: J17.6@10.16,31.623 11.938,29.845 29.337,29.845 J14.8@32.113,32.621
ARM_STEP_2: J14.9 J17.7 | length 23.2
  Top Layer w0.254: J17.7@10.724,35.631 12.319,34.036 29.371,34.036 J14.9@32.14,36.806
ARM_STEP_3: J14.10 J17.8 | length 23.3
  Top Layer w0.254: J17.8@10.772,40.028 12.573,38.227 29.464,38.227 J14.10@32.199,40.962
C1_EN: J2.17 J16.1 | length 121
  Bottom Layer w0.254: J16.1 14.052,46.5 ; 14.052,46.482 35.814,46.482 62.611,19.685 91.221,19.685 93.858,22.322 93.858,42.447 J2.17
C2_EN: J2.18 J16.2 | length 140.7
  Bottom Layer w0.254: J16.2@9.613,54.701 9.26,54.348 7.993,54.348 7.112,53.467 7.112,46.691 9.734,44.069 36.195,44.069 61.849,18.415 92.202,18.415 94.869,21.082 94.869,47.752 94.234,48.387 91.918,48.387 J2.18
C3_EN: J2.19 J16.3 | length 154.8
  Bottom Layer w0.254: J16.3@9.613,58.901 9.131,58.419 8.127,58.419 5.969,56.261 5.969,45.847 8.89,42.926 36.068,42.926 61.56,17.434 92.745,17.434 96.393,21.082 96.393,51.562 94.974,52.981 91.936,52.981 J2.19
C4_EN: J2.20 J16.6 | length 111.2
  Bottom Layer w0.254: J16.6@9.652,71.401 12.038,73.787 55.118,73.787 62.104,80.773 84.183,80.773 ; 84.184,80.772 87.63,80.772 94.742,73.66 94.742,57.658 93.642,56.558 J2.20@92.12,56.558 ; J2.20@90.996,56.735 J2.20@91.168,56.907
CE_N: J2.10 J16.9 | length 98
  Bottom Layer w0.254: J16.9@15.113,54.701 16.419,56.007 32.893,56.007 59.69,29.21 78.613,29.21 89.281,39.878 89.281,45.466 88.072,46.675 J2.10
DIR_1: J9.4 J17.4 | length 55.9
  Bottom Layer w0.254: J17.4@9.475,23.427 11.896,21.006 48.59,21.006 J9.4@59.716,9.88
DIR_2: J10.4 J17.3 | length 41.5
  Bottom Layer w0.254: J17.3@9.475,19.227 11.684,17.018 40.259,17.018 J10.4@47.168,10.109
DIR_3: J11.4 J17.2 | length 27.5
  Bottom Layer w0.254: J17.2@9.475,15.027 11.548,12.954 31.75,12.954 J11.4@34.848,9.856
DIR_4: J12.4 J17.1 | length 14.8
  Bottom Layer w0.254: J17.1@10.16,10.846 12.605,8.401 21.99,8.401 J12.4@23.407,9.818
GND: C1.1 C2.1 C3.1 C4.1 C5.1 C7.2 C8.1 C15.1 C16.1 C17.1 D1.1 D2.2 D3.2 IC1.1 IC1.2 IC1.3 IC1.10 IC2.6 IC2.9 IC3.2 J2.1 J2.5 J2.9 J2.11 J2.13 J2.14 J2.21 J2.MH1 J2.MH2 J3.4 J3.MH1 J3.MH2 J4.2 J5.3 J6.3 J7.3 J8.3 J9.3 J10.3 J11.3 J12.3 J14.2 J14.7 J15.3 J16.4 J16.10 J16.14 J17.5 J17.13 J18.5 J18.MP1 J18.MP2 J18.MP3 J18.MP4 J18.MP5 J18.MP6 J19.2 R3.1 R5.1 R12.1 TP2.1 TP6.1 TP7.1 | length 0
  Top Layer w0.254: J14.2@26.613,28.421 J14.2
  other v1: 67.945,23.114 69.088,23.114 70.051,23.117 67.945,24.384 69.088,24.384 70.104,24.384
IBAT: J2.12 J16.11 | length 76
  Bottom Layer w0.254: J16.11@15.113,63.101 71.773,63.101 80.01,54.864 87.441,54.864 J2.12
INT_N: J2.15 J16.13 | length 75.9
  Bottom Layer w0.254: J16.13@15.113,71.501 84.582,71.501 87.63,68.453 87.63,66.704 J2.15@87.863,66.471
LIDAR_RX: J15.2 J16.7 | length 20.1
  Bottom Layer w0.254: J16.7@9.652,75.601 21.073,87.022 J15.2@21.073,90.932
NetC6_1: C6.1 D1.2 IC2.8 L1.1
NetC6_2: C6.2 IC2.1 | length 11.3
  Top Layer w0.254: C6.2@64.77,26.503 64.77,19.304 65.151,18.923 66.294,18.923 67.167,19.796 IC2.1
NetC16_2: C16.2 IC3.4 | length 2.5
  Top Layer w0.254: IC3.4 C16.2@51.816,71.588
NetD2_1: D2.1 R9.1 | length 2.9
  Top Layer w0.254: R9.1@68.326,72.151 68.326,74.388 D2.1@68.799,73.915
NetD3_1: D3.1 R14.1 | length 2.4
  Top Layer w0.254: R14.1 D3.1
NetIC1_17: IC1.17 R3.2 | length 8.2
  Top Layer w0.254: R3.2@43.322,79.629 51.504,79.629 IC1.17
NetJ15_4: J15.4 R12.2 R13.1 | length 9.3
  Top Layer w0.254: J15.4@25.273,90.932 25.595,90.61 25.595,84.626 25.654,84.567 25.654,81.803 R13.1
PG_N: J2.22 R14.2 | length 20.3
  Top Layer w0.254: R14.2 74.183,70.485 86.614,70.485 91.176,65.923 91.176,65.129 J2.22
PWM_1: J9.2 J17.12 R10.2 | length 64.9
  Top Layer w0.254: R10.2 58.039,15.621 J9.2@63.627,10.033
  Bottom Layer w0.254: J17.12@14.975,23.427 15.435,23.427 16.51,22.352 51.308,22.352 J9.2@64.389,9.271
PWM_2: J10.2 J17.11 R10.1 | length 47.3
  Top Layer w0.254: J10.2 51.571,13.217 53.975,15.621 R10.1
  Bottom Layer w0.254: J17.11@14.975,19.004 15.437,18.542 42.291,18.542 J10.2@50.888,9.945
PWM_3: J11.2 J17.10 R11.2 | length 38.8
  Top Layer w0.254: R11.2 12.954,3.922 12.954,12.783 J17.10@14.975,14.804
  Bottom Layer w0.254: J17.10@14.975,15.027 33.741,15.027 J11.2@39.506,9.262
PWM_4: J12.2 J17.9 R11.1 | length 19
  Top Layer w0.203: J17.9@15.66,10.475 J17.9@15.66,10.623
  Top Layer w0.254: R11.1 14.366,9.181 J17.9@15.66,10.475
  Bottom Layer w0.254: J17.9@16.38,11.557 26.035,11.557 J12.2@27.441,10.151
QON_N: J2.16 J16.8 | length 107
  Bottom Layer w0.254: J16.8@15.113,50.501 17.989,47.625 37.354,47.625 63.786,21.193 89.689,21.193 91.63,23.134 J2.16
SCL: IC1.18 J2.6 J16.5 R1.1 | length 123.5
  Top Layer w0.254: J16.5@9.613,67.301 11.781,69.469 24.969,69.469 34.479,78.979 R1.1 v1(37.735,78.978) ; v1(49.776,78.984) 49.794,79.002 51.527,79.002 IC1.18
  Bottom Layer w0.254: J16.5@9.613,67.301 11.636,65.278 79.027,65.278 80.424,63.881 J2.6 ; v1(37.735,78.978) 38.878,78.978 49.77,78.978 v1(49.776,78.984)
SCL_1: IC1.6 J5.2 | length 18.1
  Top Layer w0.254: IC1.6 61.031,80.97 J5.2@71.247,91.186
SCL_2: IC1.9 J7.2 | length 10.2
  Top Layer w0.254: IC1.9 58.834,82.92 59.436,83.522 59.436,90.034 J7.2@58.411,91.059
SCL_3: IC1.13 J6.2 | length 12.6
  Top Layer w0.254: J6.2@45.711,91.059 45.711,85.734 49.175,82.27 IC1.13
SCL_4: IC1.16 J8.2 | length 22.6
  Top Layer w0.254: J8.2@33.392,91.02 33.821,91.02 44.521,80.32 IC1.16
SDA: IC1.19 J2.7 J16.12 R2.1 | length 111.1
  Top Layer w0.254: J16.12@15.113,67.301 27.55,67.301 38.663,78.414 39.186,78.414 R2.1 39.598,78.37 IC1.19 ; R2.1@39.116,78.359 39.239,78.482 R2.1@39.37,78.482
  Bottom Layer w0.254: J16.12@15.113,67.301 80.273,67.301 82.321,65.253 82.41,65.253 82.988,64.675 J2.7
SDA_1: IC1.5 J5.4 | length 22.5
  Top Layer w0.254: IC1.5 64.581,80.32 65.668,81.407 J5.4@75.447,91.186
SDA_2: IC1.8 J7.4 | length 12.2
  Top Layer w0.254: IC1.8 59.537,82.27 62.611,85.344 J7.4@62.611,91.059
SDA_3: IC1.12 J6.4 | length 10.6
  Top Layer w0.254: J6.4@49.869,91.139 49.869,90.497 49.149,89.777 49.149,83.439 49.668,82.92 IC1.12
SDA_4: IC1.15 J8.4 | length 18.1
  Top Layer w0.254: J8.4@37.592,91.02 38.112,91.02 38.623,90.509 38.65,90.509 48.189,80.97 IC1.15
STAT: J2.8 R9.2 | length 16.9
  Top Layer w0.254: v1(68.326,69.215) R9.2
  Bottom Layer w0.254: v1(68.326,69.215) 68.345,69.196 82.296,69.196 82.363,69.129 83.176,69.129 J2.8
Vsense: IC2.4 R4.1 R5.2 | length 5.8
  Top Layer w0.254: IC2.4 70.977,19.946 71.126,19.797 R5.2 R4.1
VSYS: C3.2 C4.2 C5.2 IC2.7 J2.2 J2.3 J2.4 TP5.1 | length 52.5
  Top Layer w1: IC2.7 C3.2@68.437,29.141 ; C3.2@68.453,29.157 C4.2@68.453,31.089 ; C5.2 v2(68.667,36.689) 68.808,36.83 72.136,36.83 TP5.1 ; C4.2@68.707,31.676 C5.2@68.707,34.457
  Bottom Layer w1: v2(68.667,36.689) 68.707,36.729 68.707,49.149 72.39,52.832 83.473,52.832 J2.4 J2.3 J2.2
pads on no net: IC2.2 IC2.3 IC2.5 IC3.3 IC3.5 IC3.7 J3.2 J3.3 J16.MH1 J16.MH2 J17.17 J17.18 J18.2 J18.3 J18.4

## Polygon pours and split planes (outlines as drawn)
5V on PWR "Bottom Layer-5V" (solid, pour order 38): 0.102,0.102 98.069,0.102 98.069,99.72 80.239,99.72 80.239,83.312 80.172,83.15 79.537,82.515 79.375,82.448 64.865,82.448 64.11,81.693 64.11,67.691 64.043,67.529 63.281,66.767 63.119,66.7 42.672,66.7 42.443,66.929 42.443,80.804 42.323,80.924 28.702,80.924 28.473,81.153 28.473,99.72 0.102,99.72
3V3 on PWR "Bottom Layer-3V3" (solid, pour order 39): 28.931,81.382 42.418,81.382 42.58,81.315 42.834,81.061 42.901,80.899 42.901,67.158 63.024,67.158 63.652,67.786 63.652,81.788 63.719,81.95 64.608,82.839 64.77,82.906 79.28,82.906 79.781,83.407 79.781,99.72 28.931,99.72
GND on Top Layer "GND_L01_P047" (solid, pour order 47): -0.025,-0.025 98.146,-0.025 98.146,99.797 -0.025,99.797
NetC6_1 on Top Layer "NETC6_1_L01_P044" (solid, pour order 44): 54.61,36.83 54.991,36.449 63.627,36.449 63.627,27.395 66.322,27.395 66.322,26.261 66.421,26.162 66.548,26.289 67.437,26.289 67.437,42.545 66.294,42.545 54.61,42.545
5V on Top Layer "5V_L01_P043" (solid, pour order 43): 53.594,47.244 67.327,47.244 67.945,47.862 67.945,55.88 53.594,55.88
12V on Top Layer "12V_L01_P041" (solid, pour order 41): 25.019,0.127 82.677,0.127 82.677,6.756 33.909,6.756 33.68,6.985 33.784,26.195 30.099,26.195 30.099,6.382 25.019,6.382
GND on Bottom Layer "GND_L04_P049" (solid, pour order 49): 0,0 98.171,0 98.171,99.822 0,99.822
GND on GND "GND_L03_P050" (solid, pour order 50): 0.508,1.397 97.282,1.397 97.155,1.524 97.155,99.06 1.143,99.06 0.635,99.568 0.508,99.441 0.508,99.314

## Silkscreen, mask and mechanical layers (free items; w line width, h text height)
Top Overlay:
  text "ENC2" at 56.769,84.709 h1.52
  text "ENC3" at 43.688,84.201 h1.52
  text "ENC4" at 31.242,83.693 h1.52
  text "ENC1" at 69.215,83.693 h1.52
  text "LIDAR" at 17.272,83.312 h1.52
  text "STAT" at 71.501,72.009 h1.52 r90
  text "PG_N" at 77.597,71.501 h1.52 r90
  text "STEP3" at 35.179,40.894 h1.52
  text "STEP2" at 35.306,36.576 h1.52
  text "STEP1" at 35.306,32.131 h1.52
  text "EX 5V" at 83.312,19.685 h1.52
  text "MOTOR2" at 44.704,14.224 h1.52
  text "MOTOR1" at 58.42,14.097 h1.52
  text "MOTOR3" at 33.274,13.843 h1.52
  text "MOTOR4" at 20.32,13.716 h1.52
  text "12V" at 70.231,13.716 h1.52
  text "FAN" at 78.359,13.462 h1.52
Board Shape:
  the board outline again, w1.2